# Altium PCB Routado.PcbDoc
Units mm, origin at the board's own origin, x right, y up, seen from the top; angles counter-clockwise.
Board outline 100 x 100 mm, 2 copper layers (Top Layer, Bottom Layer); 33 components, 19 nets, 79 pads, 0 vias.
Unrouted connection lines stored in the file: 23.
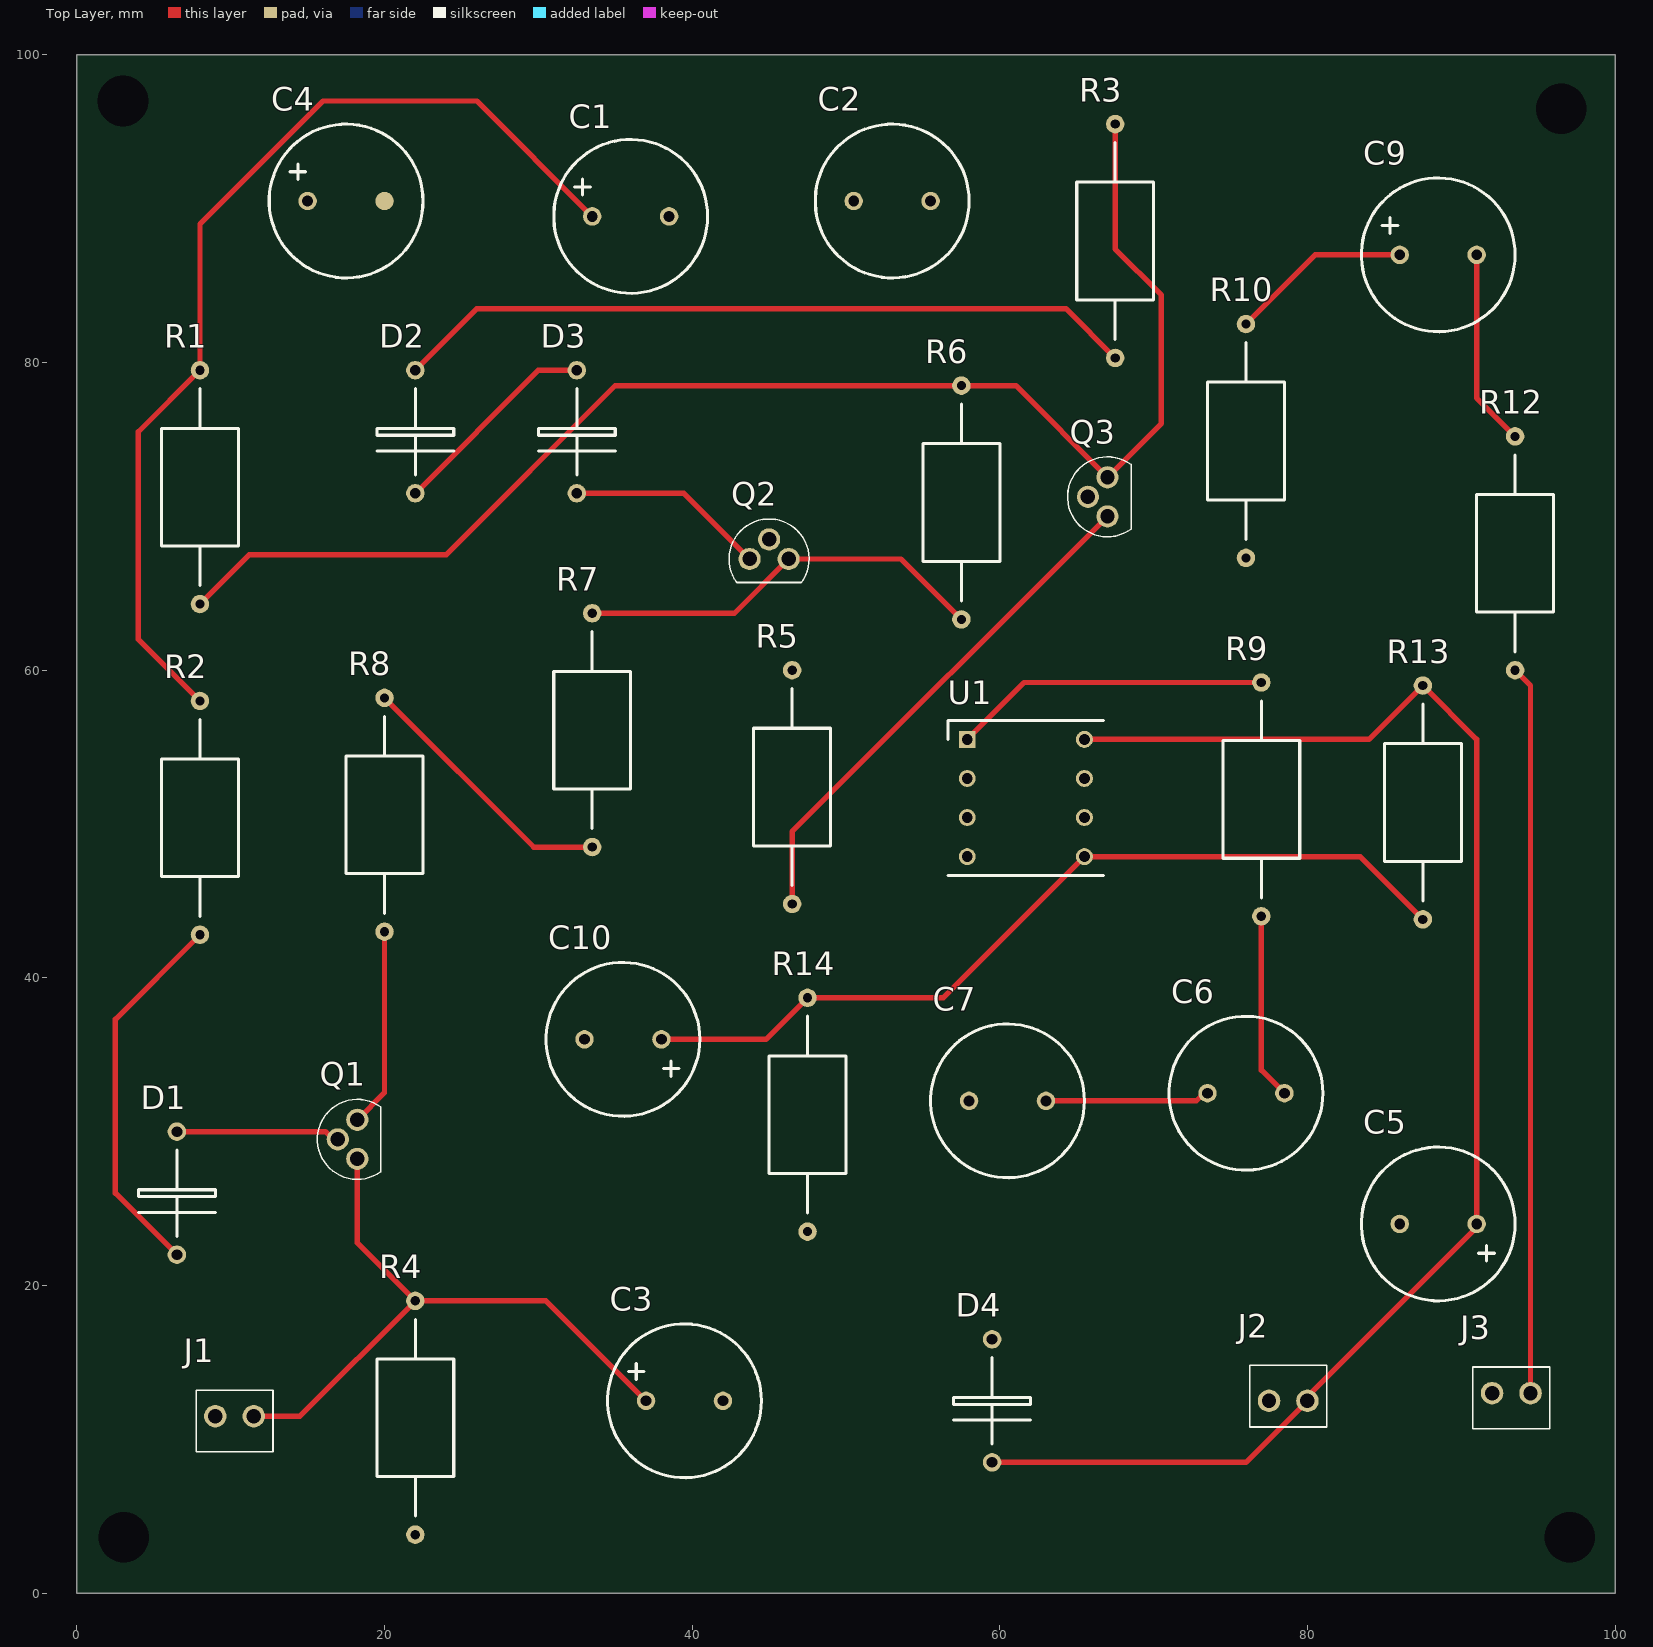
[diagram p0: Top Layer view]
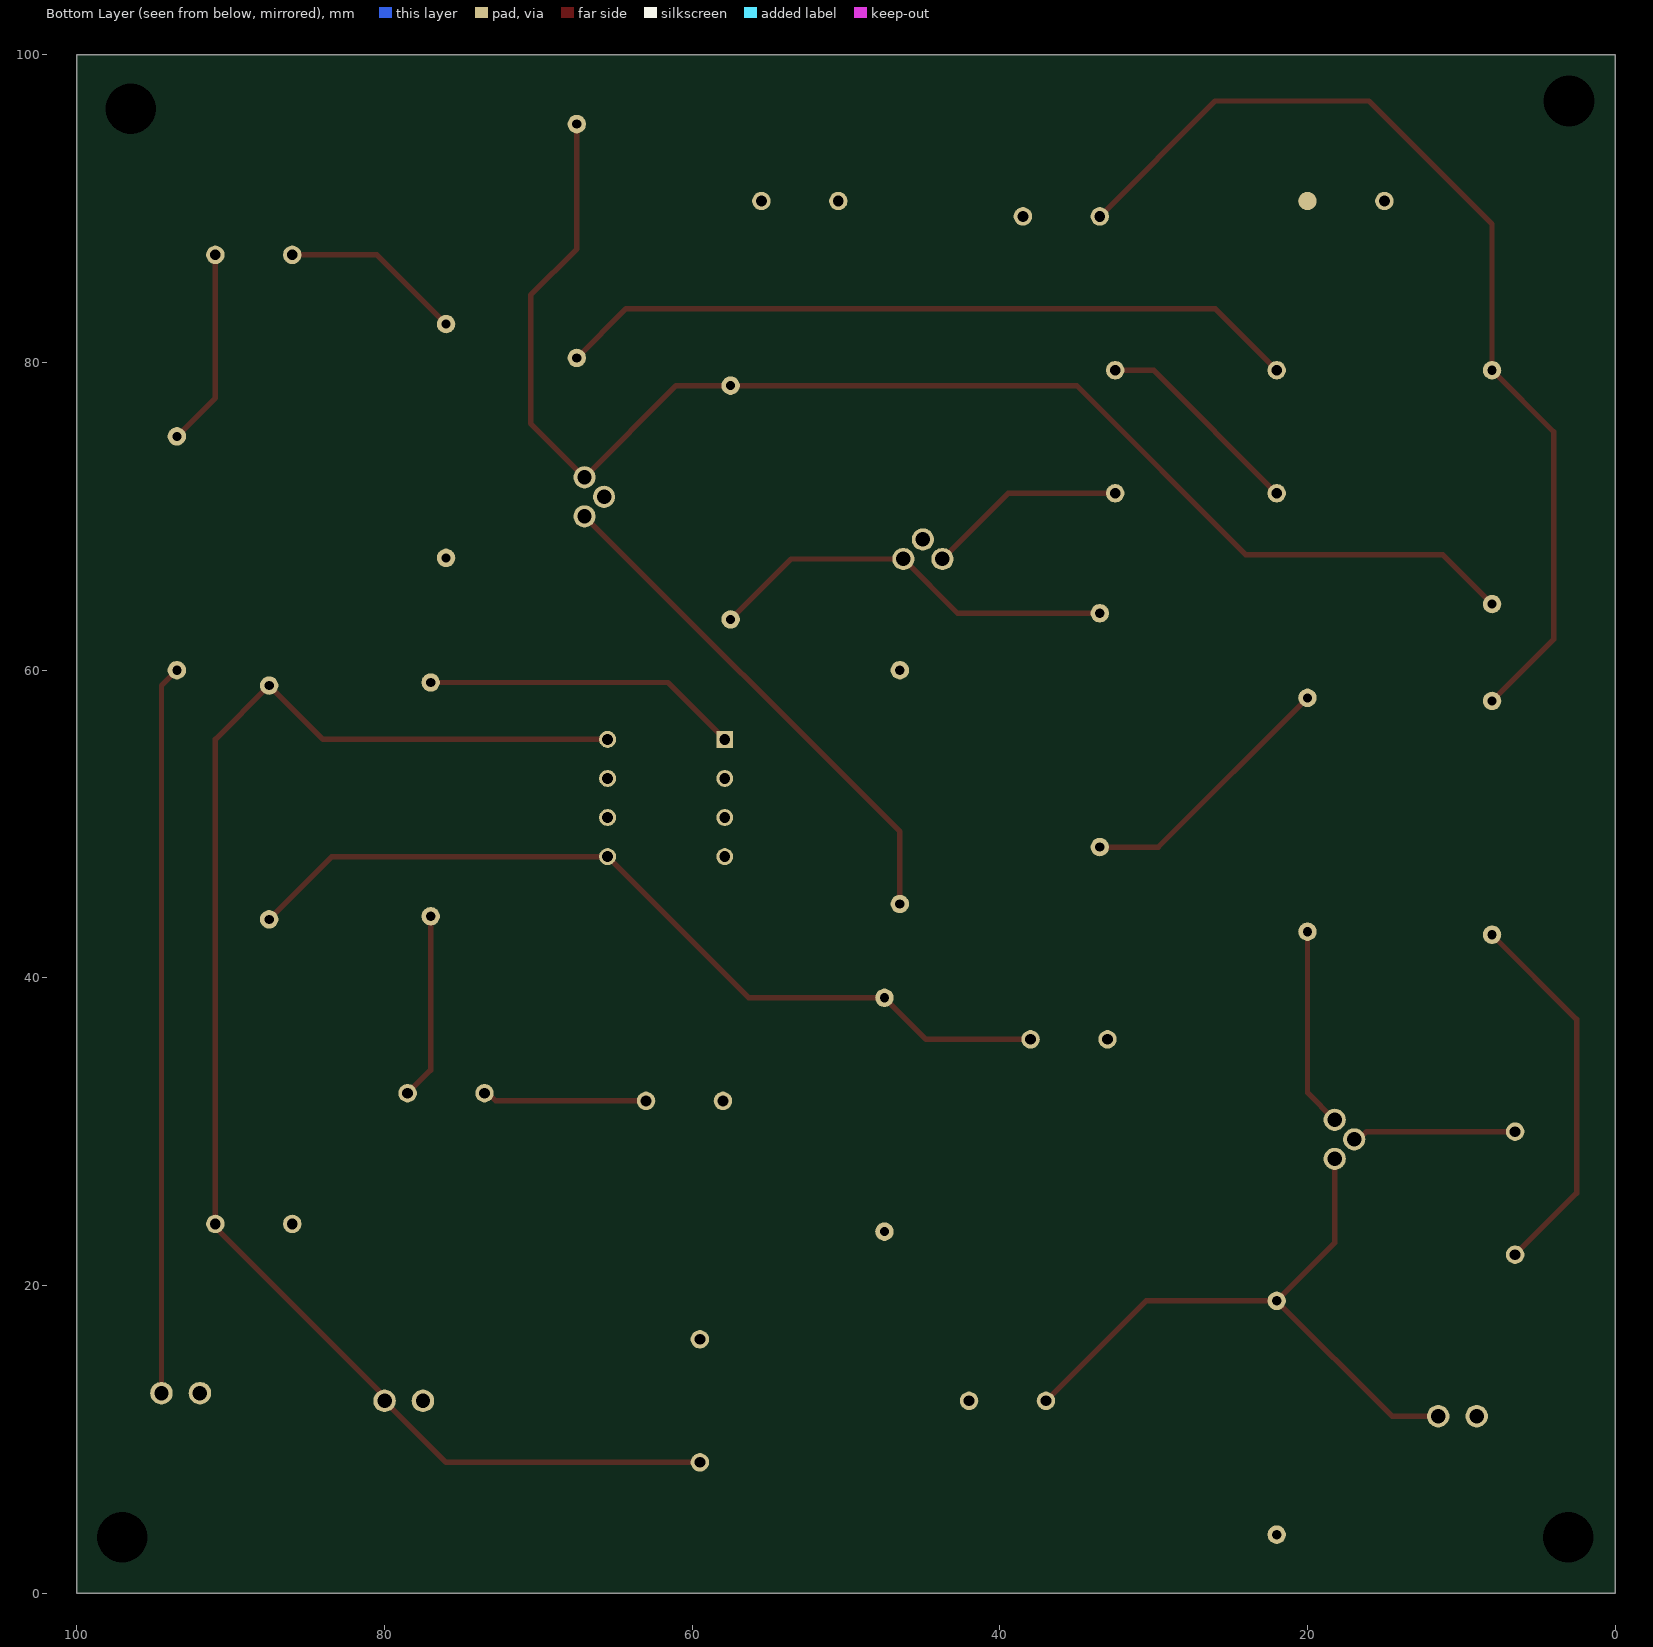
[diagram p1: Bottom Layer view, seen from below]

## Layer stack, top to bottom
Top Solder: solder mask 0.0102, Solder Resist, Dk 3.5
Top Layer: signal copper 0.105
Dielectric 1: dielectric 0.32, FR-4, Dk 4.8
Bottom Layer: signal copper 0.012
Bottom Solder: solder mask 0.0102, Solder Resist, Dk 3.5

## Board outline
0,100 100,100 100,0 0,0
board region "Default Layer Stack Region": 0,100 100,100 100,0 0,0
board region "Default Layer Stack Region": 0,100 100,100 100,0 0,0
board region "Layer Stack Region 1": 0,100 100,100 100,0 0,0

## Design rules (kind name [scope] priority, off if disabled: settings)
BoardOutlineClearance [All] p1: gap=0.2 ignorepadtopadclearanceinfootprint=FALSE
Clearance [All] p1: gap=0.127 ignorepadtopadclearanceinfootprint=FALSE except(0.25: Arc-Hole Track-Hole SMDPad-Hole THPad-Hole Via-Hole Fill-Hole Poly-Hole Region-Hole Text-Hole)
ComponentClearance [All] p1: gap=0.127 collisioncheckmode=3 verticalgap=0.127 showdistances=TRUE
DiffPairsRouting [All] p1: maxlimit=0.254 minlimit=0.127 mostfreqgap=0.127 toplayer_minwidth=0.127 toplayer_maxwidth=25.4 toplayer_prefwidth=0.127 bottomlayer_minwidth=0.127 bottomlayer_maxwidth=25.4 bottomlayer_prefwidth=0.127 maxuncoupledlength=12.7
Height [All] p1: minheight=0 maxheight=1816.048 prefheight=12.7
HoleSize [All] p1: absolutevalues=TRUE maxlimit=6.3 minlimit=0.3 maxpercent=80.000 minpercent=20.000
HoleToHoleClearance [All] p1: gap=0.25 allowstackedmicrovias=FALSE
MinimumAnnularRing [All] p1: minimumring=0.076
MinimumSolderMaskSliver [All] p1: minsoldermaskwidth=0
PlaneClearance [All] p1: clearance=0.127
PlaneConnect PlaneConnectPowerPads [InPadClass('PowerPads')] p1: planeconnectstyle=Direct reliefexpansion=0.508 reliefentries=4 reliefconductorwidth=0.254 reliefairgap=0.254
PlaneConnect [All] p2: pad.planeconnectstyle=Relief pad.reliefexpansion=0.3 pad.reliefentries=4 pad.reliefconductorwidth=0.127 pad.reliefairgap=0.127 via.planeconnectstyle=Direct via.reliefexpansion=0.3 via.reliefentries=4 via.reliefconductorwidth=0.127 via.reliefairgap=0.127
PolygonConnect PolygonConnectPowerPads [All vs (InPadClass('PowerPads'))] p1: connectstyle=Direct reliefconductorwidth=0.254 reliefentries=4 polygonreliefangle="90 Angle" airgapwidth=0.254
PolygonConnect [All] p2: thpad.connectstyle=Relief thpad.reliefconductorwidth=0.127 thpad.reliefentries=4 thpad.polygonreliefangle="90 Angle" thpad.airgapwidth=0.127 smdpad.connectstyle=Relief smdpad.reliefconductorwidth=0.127 smdpad.reliefentries=4 smdpad.polygonreliefangle="90 Angle" smdpad.airgapwidth=0.127 via.connectstyle=Direct via.reliefconductorwidth=0.127 via.reliefentries=4 via.polygonreliefangle="90 Angle" via.airgapwidth=0.127
RoutingVias [All] p1: holewidth=0.3 width=0.6 viastyle="Through Hole" minholewidth=0.3 minwidth=0.6 maxholewidth=0.6 maxwidth=6.6
SilkToSilkClearance [All] p1: silktosilkclearance=0
SilkToSolderMaskClearance [IsPad] p1: minsilkscreentomaskgap=0.127 clearancetoexposedcopper=TRUE
SolderMaskExpansion [All] p1: expansion=0.075 istentingtop=FALSE
Width [All] p1: maxlimit=25.4 minlimit=0.127 preferedwidth=0.127 minimp=50.000000 maximp=50.000000 favimp=50.000000
20 further rules are at their usual default settings.

## Classes and differential pairs
component class Project: * C1 C2 C3 C4 C5 C6 C7 C9 C10 D1 D2 D3 D4 J1 J2 J3 R1 R2 R3 R4 R5 R6 R7 R8 R9 R10 R12 R13 R14 U1

## Components (designator, comment, footprint, x,y, rotation, side; value= is the part's Value field where it differs from the comment)
C1 "Cap Pol1" "Capacitor - Pol"#1 33.5,89.5 r0 top value=10uF
C2 "Cap" Capacitor 55.5,90.5 r180 top value=0.1uF
C3 "Cap Pol1" "Capacitor - Pol"#1 37,12.5 r0 top value=47uF
C4 "Cap Pol1" "Capacitor - Pol"#2 15,90.5 r0 top value=2.2uF
C5 "Cap Pol1" "Capacitor - Pol"#1 91,24 r180 top value=47uF
C6 "Cap" Capacitor 73.5,32.5 r0 top value=0.01uF
C7 "Cap" Capacitor 58,32 r0 top value=47pF
C9 "Cap Pol1" "Capacitor - Pol"#1 86,87 r0 top value=1uF
C10 "Cap Pol1" "Capacitor - Pol"#1 38,36 r180 top value=10uF
D1 "Photodiode" Diode 6.5,30 r270 top
D2 "Diode 1N5408" Diode 22,79.5 r270 top
D3 "Diode 1N5408" Diode 32.5,79.5 r270 top
D4 "Diode 1N5408" Diode 59.5,16.5 r270 top
J1 "Jumper" JUMPER 11.5,11.5 r180 top
J2 "Jumper" JUMPER 77.5,12.5 r0 top
J3 "Jumper" JUMPER 94.5,13 r180 top
Q1 "JFET-N" TRANSISTOR 18.23,28.23 r90 top
Q2 "NPN" TRANSISTOR 43.73,67.23 r0 top
Q3 "NPN" TRANSISTOR 67,70 r90 top
R1 "Res1" "RES - Axial 0.6" 8,79.5 r270 top value=100K
R2 "Res1" "RES - Axial 0.6" 8,42.8 r90 top value=220K
R3 "Res1" "RES - Axial 0.6" 67.5,80.3 r90 top value=47K
R4 "Res1" "RES - Axial 0.6" 22,3.8 r90 top value=10
R5 "Res1" "RES - Axial 0.6" 46.5,60 r270 top value=120
R6 "Res1" "RES - Axial 0.6" 57.5,63.3 r90 top value=15K
R7 "Res1" "RES - Axial 0.6" 33.5,48.5 r90 top value=47K
R8 "Res1" "RES - Axial 0.6" 20,43 r90 top value=47K
R9 "Res1" "RES - Axial 0.6" 77,44 r90 top value=2.2K
R10 "Res1" "RES - Axial 0.6" 76,82.5 r270 top value=330K
R12 "Res1" "RES - Axial 0.6" 93.5,60 r90 top value=47
R13 "Res1" "RES - Axial 0.6" 87.5,43.8 r90 top value=100K
R14 "Res1" "RES - Axial 0.6" 47.5,23.5 r90 top value=100K
U1 "LM833N/NOPB" DIP8 57.88,55.5 r0 top

## Footprints (in the part's own frame and the unit in brackets; to place one, negate y for a bottom-side part, rotate by r counter-clockwise, add the part's x,y. Pads: shape width x height; smd on the part's side, far side on the other; paste and mask are expansions set on the pad)
Capacitor [mm]
  round 1.2 hole 0.7: 1(0,0) 2(5,0)
  silkscreen extent -2.5,-5 7.5,5
"Capacitor - Pol"#1 [mm]
  round 1.2 hole 0.7: 1(0,0) 2(5,0)
  silkscreen extent -2.5,-5 7.5,5
"Capacitor - Pol"#2 [mm]
  round 1.2 hole 0.7: 1(0,0)
  round 1.2 all layers, no hole: 2(5,0)
  silkscreen extent -2.5,-5 7.5,5
Diode [mm]
  round 1.2 hole 0.7: 1(0,0) 2(8,0)
  silkscreen extent 1.2,-2.5 6.8,2.5
DIP8 [mm]
  rect 1.1x1.1 hole 0.7: 1(0,0)
  round 1.1 hole 0.7: 2(0,-2.54) 3(0,-5.08) 4(0,-7.62) 5(7.62,-7.62) 6(7.62,-5.08) 7(7.62,-2.54) 8(7.62,0)
  silkscreen extent -1.24,-8.86 8.86,1.24
JUMPER [mm]
  round 1.462 hole 0.94: 1(0,0) 2(2.5,0)
  silkscreen extent -1.25,-1.7 3.75,2.3, body extent -1.25,-1.7 3.75,2.3, height 7.7
"RES - Axial 0.6" [mm]
  round 1.2 hole 0.6: 1(0,0) 2(15.2,0)
  silkscreen extent 1.2,-2.5 14,2.5
TRANSISTOR [mm]
  round 1.44 hole 0.94: 1(2.54,0) 2(1.27,1.27) 3(0,0)
  silkscreen extent -1.33,-1.53 3.87,2.6

## Part data
C1 C3 C4 C5 C9 C10: "Polarized Capacitor (Radial)", LatestRevisionDate=17-Jul-2002, LatestRevisionNote="Re-released for DXP Platform.", PackageDescription="Polarized Capacitor (Radial); 2 Leads", PackageReference=RB7.6-15, Published=8-Jun-2000, Publisher="Altium Limited"
C2 C6 C7: "Capacitor", LatestRevisionDate=17-Jul-2002, LatestRevisionNote="Re-released for DXP Platform.", PackageDescription="Radial Cap, Thru-Hole; 2 Leads; 0.3 in Pin Spacing", PackageReference=RAD-0.3, Published=8-Jun-2000, Publisher="Altium Limited"
D2 D3 D4: "3 Amp Medium Power Silicon Rectifier Diode", ComponentLink1Description="Manufacturer Link", ComponentLink1URL=http://www.irf.com/, DatasheetVersion=Aug-1984, LatestRevisionDate=17-Jul-2002, LatestRevisionNote="Re-released for DXP Platform.", PackageDescription="Diode, Axial; Body 9.5 x 5.3 mm (LxDia. max), Lead Dia. 1.32 mm (max)", PackageReference=DO-201AD, Published=8-Jun-2000, Publisher="Altium Limited"
Q1: "N-Channel JFET", Code_JEDEC=TO-254-AA, LatestRevisionDate=17-Jul-2002, LatestRevisionNote="Re-released for DXP Platform.", PackageReference=TO-254-AA, Published=8-Jun-2000, Publisher="Altium Limited"
Q2 Q3: "NPN Bipolar Transistor", Code_JEDEC=TO-226-AA, LatestRevisionDate=17-Jul-2002, LatestRevisionNote="Re-released for DXP Platform.", PackageDescription="TO, Flat Index; 3 In-Line, Axial Leads; Body Dia. 4.8mm; Leads 0.55 x 0.51 mm (max)", PackageReference=TO-226-AA, Published=8-Jun-2000, Publisher="Altium Limited"
R1 R2 R3 R4 R5 R6 R7 R8 R9 R10 R12 R13 R14: "Resistor", LatestRevisionDate=17-Jul-2002, LatestRevisionNote="Re-released for DXP Platform.", PackageDescription="Axial Device, Thru-Hole; 2 Leads; 0.3 in Pin Spacing", PackageReference=AXIAL-0.3, Published=8-Jun-2000, Publisher="Altium Limited"
U1: "AUDIO AMPLIFIER", Case/Package=PDIP, Dual Supply Voltage=9V, Input Bias Current=1uA, Input Offset Voltage (Vos)=5mV, Manufacturer="TI National Semiconductor", Max Dual Supply Voltage=18V, Max Operating Temperature=85°C, Min Dual Supply Voltage=5V, Min Operating Temperature=-40°C, Nominal Supply Current=5mA, Output Current=40mA, Package Quantity=40, Power Dissipation=500mW, Power Supply Rejection Ratio (PSRR)=80dB, Supplier Part Number 1=926-LM833N/NOPB, Voltage Gain=110dB, Category="Amplifiers - Op Amps, Buffer, Instrumentation", Common Mode Rejection Ratio=80dB, ComponentLink1Description=https://datasheet.ciiva.com/2973/lm833-n-2973456.pdf?src-supplier=Avnet, ComponentLink1URL=https://datasheet.ciiva.com/2973/lm833-n-2973456.pdf?src-supplier=Avnet, ComponentLink2Description=https://datasheet.ciiva.com/4755/lm833-n-220371-4755091.pdf?src-supplier=Mouser, ComponentLink2URL=https://datasheet.ciiva.com/4755/lm833-n-220371-4755091.pdf?src-supplier=Mouser, ComponentLink3Description=https://datasheet.ciiva.com/1482/1814449-1482436.pdf?src-supplier=Element14, ComponentLink3URL=https://datasheet.ciiva.com/1482/1814449-1482436.pdf?src-supplier=Element14, ComponentLink4Description=https://datasheet.ciiva.com/14153/mnlm833-e-14153231.pdf?src-supplier=Distrelec, ComponentLink4URL=https://datasheet.ciiva.com/14153/mnlm833-e-14153231.pdf?src-supplier=Distrelec, ComponentLink5Description=https://datasheet.ciiva.com/6630/lm833-n-6630645.pdf?src-supplier=Digi-Key, ComponentLink5URL=https://datasheet.ciiva.com/6630/lm833-n-6630645.pdf?src-supplier=Digi-Key, Gain Bandwidth Product=15MHz, Height=3.3mm, Lead Free="Lead Free", Length=9.27mm, Load Impedance=2kR, Manufacturer Part Number=LM833N/NOPB, Mount="Through Hole", Number of Channels=2, Number of Circuits=2, Number of Elements=2, Number of Pins=8, Operating Supply Current=5mA, Operating Supply Voltage=18V, Packaging=Rail/Tube, Pricing 1="1=0.88000, 10=0.79200, 50=0.79200, 100=0.57600, 1000=0.37500, 10000=0.37500 (USD)", Radiation Hardening=No, REACH SVHC="No SVHC", RoHS=Yes, RoHS Compliant=Yes, Series=-, Slew Rate=7V/µs, Stock 1=2883, Supplier 1=Mouser, Supply Current=5mA, Technology=BIPOLAR, Unity Gain Bandwidth Product=15MHz, Weight=0.01lb, Width=6.35mm

## Free pads (board coordinates)
  round 1.524 hole 3.3: 1(3,97) 1(3.044,3.625) 1(96.5,96.5) 1(97.044,3.625)

## Nets (pads, with @x,y where several pads share a name; then routed paths per layer and width w, separated by ;. In a path a pad name is that pad's centre, name@x,y a point inside that pad or via, vN(x,y) a via of type N, cw(c..) or ccw(c..) an arc to the next point about the centre after c; other vN are vias at no path point)
GND: C1.2 C2.1 C3.2 C4.2 C5.2 C10.2 D4.1 J1.2 R4.1 R14.1 U1.4
NetC1_1: C1.1 R1.1 R2.2 | length 66.2
  Top Layer w0.35: R2.2 4,62 4,75.5 R1.1 8,89 16,97 26,97 C1.1
NetC2_2: C2.2 D1.2 R2.1 | length 24.7
  Top Layer w0.35: D1.2 2.5,26 2.5,37.3 R2.1
NetC3_1: C3.1 J1.1 Q1.3 R4.2 | length 42.1
  Top Layer w0.35: J1.1 14.5,11.5 R4.2 ; Q1.3 18.23,22.77 R4.2 ; C3.1 30.5,19 R4.2
NetC4_1: C4.1 Q2.2 R7.1 R8.2 | length 17.5
  Top Layer w0.35: R8.2 29.7,48.5 R7.1
NetC5_1: C5.1 D4.2 J2.2 Q3.1 R1.2 R3.2 R6.2 R13.2 U1.8 | length 191.1
  Top Layer w0.35: R1.2 11.2,67.5 24,67.5 35,78.5 R6.2 61.04,78.5 Q3.1 70.5,76.04 70.5,84.385 67.5,87.385 R3.2 ; D4.2 76,8.5 J2.2 80,12.77 91,23.77 C5.1 91,55.5 R13.2 84,55.5 U1.8
NetC6_1: C6.1 C7.2 R10.2 U1.6 | length 10.7
  Top Layer w0.35: C7.2 72.77,32 73.27,32.5 C6.1
NetC6_2: C6.2 R9.1 | length 12.1
  Top Layer w0.35: R9.1 77,34 C6.2
NetC7_1: C7.1 C9.1 R10.1 U1.7 | length 11.9
  Top Layer w0.35: R10.1 80.5,87 C9.1
NetC9_2: C9.2 R12.2 | length 12.8
  Top Layer w0.35: C9.2 91,77.7 R12.2
NetC10_1: C10.1 R13.1 R14.2 U1.5 | length 56.1
  Top Layer w0.35: C10.1 44.8,36 R14.2 56.32,38.7 U1.5 83.42,47.88 R13.1
NetD1_1: D1.1 Q1.2 | length 10.7
  Top Layer w0.35: D1.1 16.165,30 16.665,29.5 Q1.2
NetD2_1: D2.1 Q3.2 R3.1 | length 48.5
  Top Layer w0.35: D2.1 26,83.5 64.3,83.5 R3.1
NetD2_2: D2.2 D3.1 | length 13.8
  Top Layer w0.35: D2.2 30,79.5 D3.1
NetD3_2: D3.2 Q1.1 Q2.3 R5.1 R8.1 | length 26
  Top Layer w0.35: Q1.1 20,32.54 R8.1 ; D3.2 39.46,71.5 Q2.3
NetJ3_1: J3.1 R12.1 | length 47.4
  Top Layer w0.35: R12.1 94.5,59 J3.1
NetQ2_1: Q2.1 R6.1 R7.2 U1.3 | length 27.1
  Top Layer w0.35: R7.2 42.74,63.7 Q2.1 53.57,67.23 R6.1
NetQ3_3: Q3.3 R5.2 | length 33.7
  Top Layer w0.35: R5.2 46.5,49.5 Q3.3
NetR9_2: R9.2 U1.1 U1.2 | length 20.7
  Top Layer w0.35: U1.1 61.58,59.2 R9.2
pads on no net: J2.1 J3.2

## Silkscreen, mask and mechanical layers (free items; w line width, h text height)
Mechanical 1:
  drawing of 5850 lines, arcs and shapes, not listed